# Altium PCB PCB_3U_CamLink.PCBDOC (part 2 of 2)
Units mm, origin at the board's own origin, x right, y up, seen from the top; angles counter-clockwise.
Board outline 64.5 x 100 mm, 4 copper layers (TopLayer, Internal Plane 2, Internal Plane 1, BottomLayer), stack 1.543 mm thick; 107 components, 81 nets, 488 pads, 183 vias.
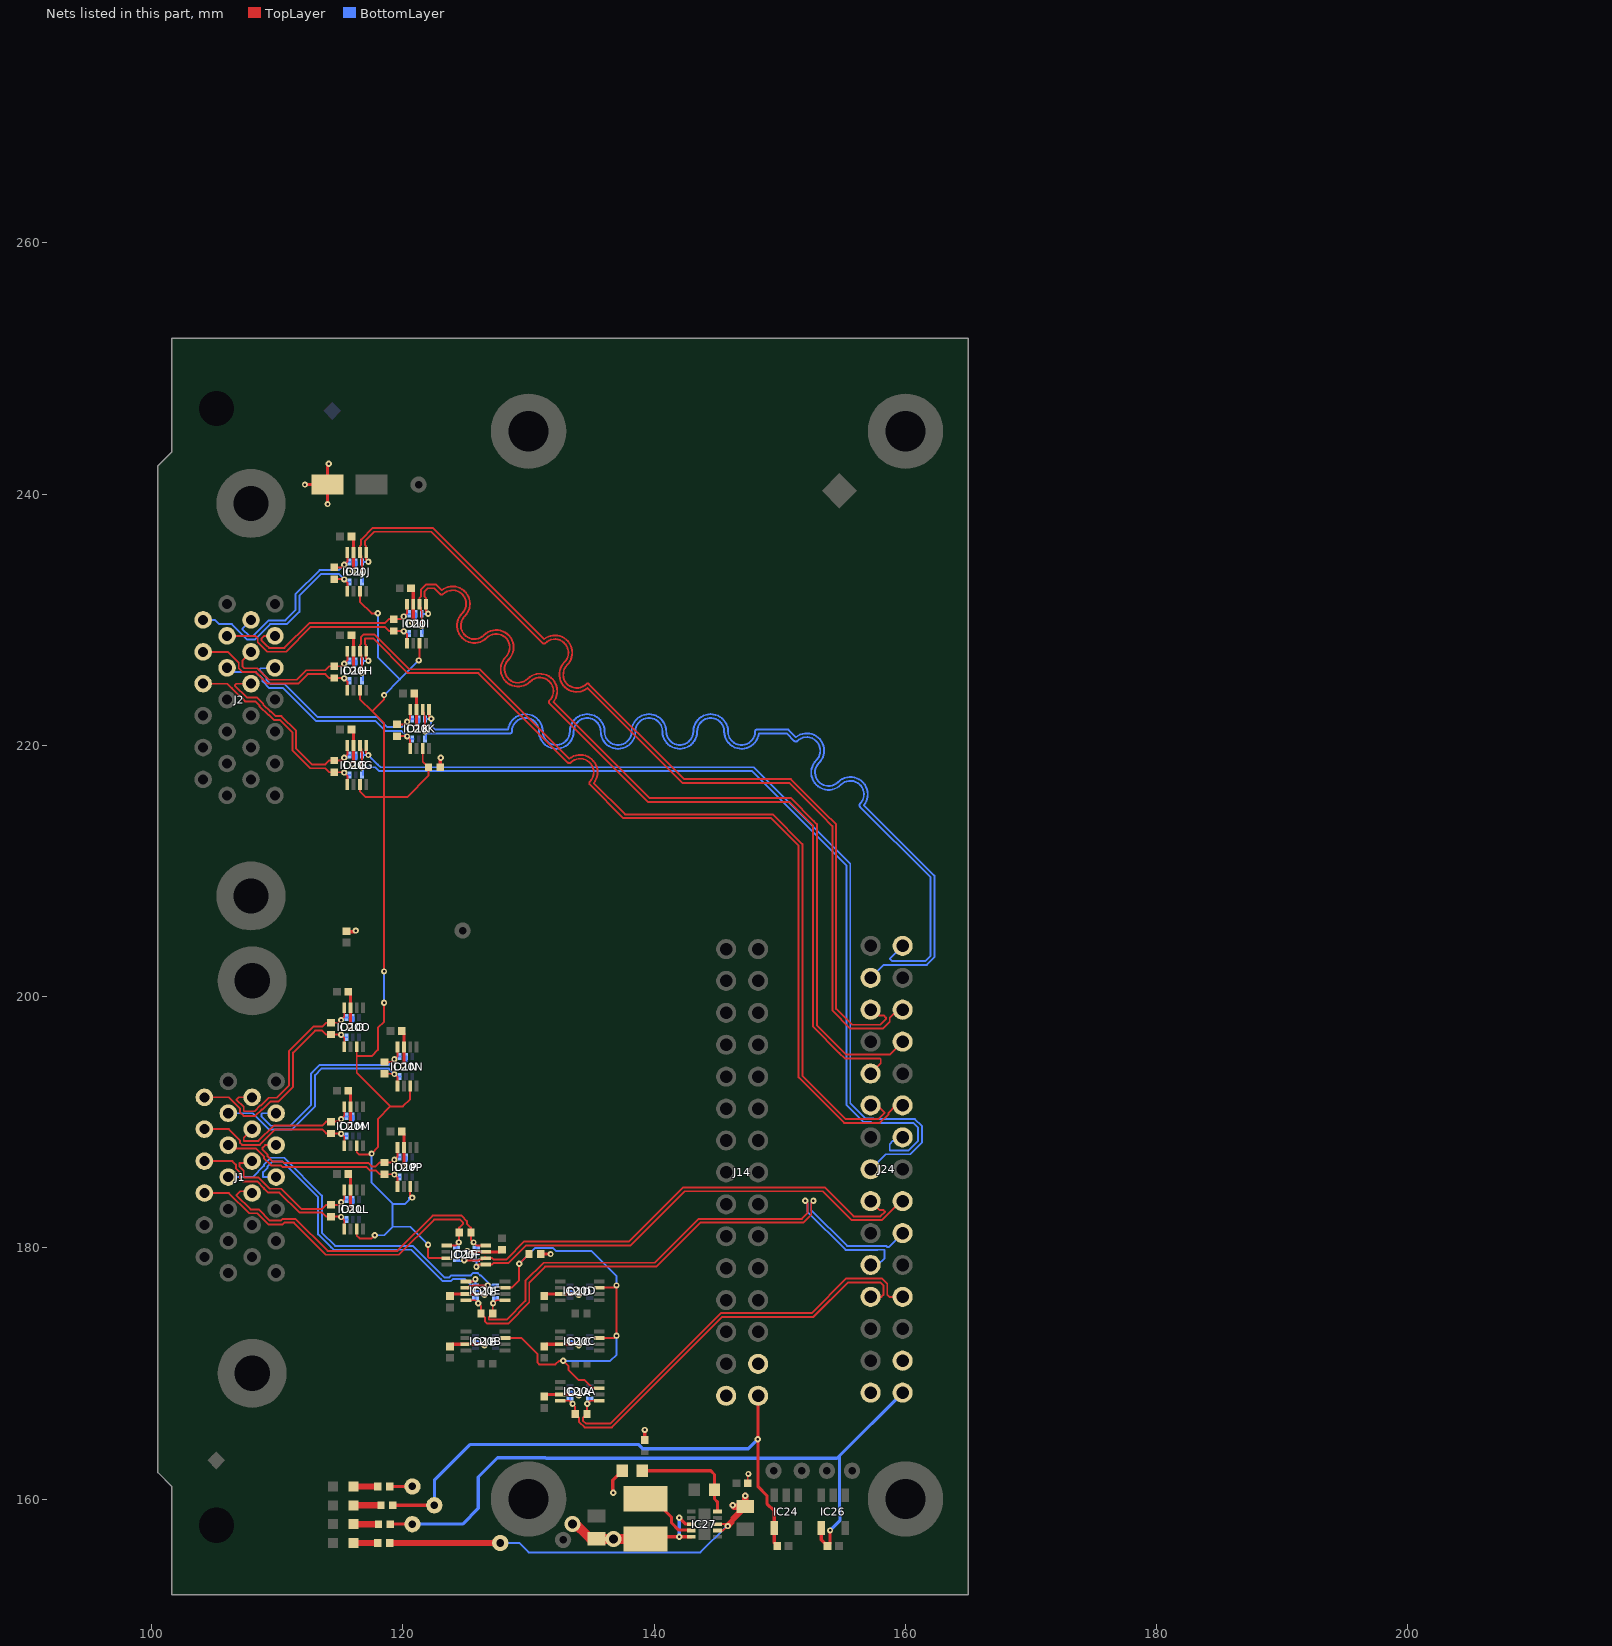
[diagram p4: the nets of this part, all layers, seen from the top]

## Via types
v1: diameter 0.5, hole 0.2, TopLayer to BottomLayer, tented both sides, 181 vias
v2: diameter 1.27, hole 0.711, TopLayer to BottomLayer, tented both sides, 2 vias

## Nets (pads, with @x,y where several pads share a name; then routed paths per layer and width w, separated by ;. In a path a pad name is that pad's centre, name@x,y a point inside that pad or via, vN(x,y) a via of type N, cw(c..) or ccw(c..) an arc to the next point about the centre after c; other vN are vias at no path point) (continued)
LVDS8_N: D1K.6 IC20K.5 J24.3 | length 74.3
  TopLayer w0.152: IC20K.5@122.075,222.85 122.075,222.275 v1(122.25,222.1)
  BottomLayer w0.152: D1K.6@121.825,222.09 122.24,222.09 v1(122.25,222.1) 122.25,221.575 122.575,221.25 128.38,221.25 cw(c129.753,221.098) 131.134,221.098 ccw(c132.21,221.098) 133.286,221.098 cw(c134.667,221.098) 136.048,221.098 ccw(c137.124,221.098) 138.2,221.098 cw(c139.581,221.098) 140.962,221.098 ccw(c142.039,221.098) 143.115,221.098 cw(c144.496,221.098) 145.877,221.098 ccw(c146.953,221.098) 148.029,221.098 cw(c148.182,221.098) 148.182,221.25 150.681,221.25 151.282,220.649 cw(c152.145,219.571) 153.526,219.571 cw(c152.145,219.571) 153.122,218.594 ccw(c153.882,217.833) 154.643,217.072 cw(c155.62,216.096) 157.001,216.096 cw(c155.62,216.096) 156.698,215.233 162.305,209.626 162.305,203.124 161.7,202.519 158.937,202.519 158.259,202.519 J24.3@157.23,201.49
LVDS8_P: D1K.1 IC20K.6 J24.2 | length 74.1
  TopLayer w0.152: IC20K.6@121.575,222.85 121.5,222.775 121.696,222.579 121.696,222.33 121.75,222.277 v1(121.75,221.125)
  BottomLayer w0.152: D1K.1@121.825,220.51 121.825,220.975 121.75,221.05 v1(121.75,221.125) 121.93,220.945 122.575,220.945 128.524,220.945 ccw(c128.524,221.098) 128.676,221.098 cw(c129.753,221.098) 130.829,221.098 ccw(c132.21,221.098) 133.591,221.098 cw(c134.667,221.098) 135.743,221.098 ccw(c137.124,221.098) 138.505,221.098 cw(c139.581,221.098) 140.658,221.098 ccw(c142.039,221.098) 143.42,221.098 cw(c144.496,221.098) 145.572,221.098 ccw(c146.953,221.098) 148.326,220.945 150.555,220.945 151.168,220.332 ; 151.168,220.332 ccw(c151.276,220.439) 151.384,220.332 cw(c152.145,219.571) 153.221,219.571 cw(c152.145,219.571) 152.906,218.81 ccw(c153.882,217.833) 154.859,216.857 cw(c155.62,216.096) 156.696,216.096 cw(c155.62,216.096) 156.381,215.335 ccw(c156.489,215.227) 156.381,215.119 162,209.5 162,203.25 161.573,202.823 158.937,202.823 158.75,203.01 J24.2@159.77,204.03
LVDS9_N: D1J.6 IC20J.5 J24.6 | length 73.8
  TopLayer w0.152: v1(117.25,234.6) 117.075,234.775 IC20J.5@117.075,235.35 117.075,235.851 116.977,235.949 116.977,236.25 117.727,237 122.25,237 131.12,228.13 ; 131.119,228.131 ccw(c131.227,228.238) 131.335,228.13 cw(c132.096,227.369) 133.172,227.369 cw(c132.096,227.369) 132.857,226.608 ccw(c133.834,225.632) 134.696,224.554 142.25,217 150.75,217 153.339,214.411 154.178,213.572 154.178,198.891 155.624,197.445 158.195,197.445 158.75,198 158.75,198.319 159.381,198.95 J24.6@159.77,198.95
  BottomLayer w0.152: D1J.6@116.825,234.59 117.24,234.59 v1(117.25,234.6)
LVDS9_P: D1J.1 IC20J.6 J24.5 | length 75.2
  TopLayer w0.152: v1(116.75,233.625) 116.75,234.777 116.696,234.83 116.696,235.079 116.5,235.275 IC20J.6@116.575,235.35 116.575,235.851 116.673,235.949 116.673,236.376 117.601,237.305 122.376,237.305 131.233,228.448 cw(c132.096,227.369) 133.477,227.369 cw(c132.096,227.369) 133.073,226.393 ccw(c133.834,225.632) 134.595,224.871 cw(c134.702,224.763) 134.811,224.871 ; 134.81,224.871 142.376,217.305 150.876,217.305 153.555,214.626 154.483,213.698 154.483,199.017 155.75,197.75 158,197.75 158.445,198.195 158.445,198.32 158.265,198.5 157.68,198.5 J24.5@157.23,198.95
  BottomLayer w0.152: v1(116.75,233.625) 116.75,233.55 116.825,233.475 D1J.1@116.825,233.01
LVDS10_N: D1I.6 IC20I.5 J24.9 | length 72.1
  TopLayer w0.152: v1(122,230.475) 121.825,230.65 IC20I.5@121.825,231.225 121.825,231.726 121.727,231.824 121.727,232.25 121.977,232.5 122.5,232.5 122.974,232.026 ; 122.974,232.026 ccw(c123.082,232.133) 123.19,232.026 cw(c123.951,231.265) 125.027,231.265 cw(c123.951,231.265) 124.712,230.504 ccw(c125.688,229.527) 126.665,228.551 cw(c127.426,227.79) 128.502,227.79 cw(c127.426,227.79) 128.187,227.029 ccw(c129.163,226.052) 130.14,225.076 cw(c130.901,224.315) 131.977,224.315 cw(c130.901,224.315) 131.662,223.554 ccw(c131.77,223.446) 131.662,223.338 ; 131.662,223.338 139.5,215.5 150.75,215.5 152.654,213.596 152.654,197.596 154.75,195.5 155.173,195.077 157.958,195.077 158.034,195 158.034,194.674 J24.9@157.23,193.87
  BottomLayer w0.152: D1I.6@121.575,230.465 121.99,230.465 v1(122,230.475)
LVDS10_P: D1I.1 IC20I.6 J24.8 | length 74.4
  TopLayer w0.152: v1(121.5,229.5) 121.5,230.652 121.446,230.705 121.446,230.954 121.25,231.15 IC20I.6@121.325,231.225 121.325,231.726 121.423,231.824 121.423,232.376 121.851,232.805 122.626,232.805 123.088,232.343 cw(c123.951,231.265) 125.332,231.265 cw(c123.951,231.265) 124.928,230.288 ccw(c125.688,229.527) 126.449,228.766 cw(c127.426,227.79) 128.807,227.79 cw(c127.426,227.79) 128.403,226.813 ccw(c129.163,226.052) 129.924,225.291 cw(c130.901,224.315) 132.282,224.315 cw(c130.901,224.315) 131.979,223.452 139.626,215.805 150.876,215.805 152.716,213.966 152.959,213.722 152.959,197.722 155.3,195.381 158.741,195.381 J24.8@159.77,196.41
  BottomLayer w0.152: v1(121.5,229.5) 121.5,229.425 121.575,229.35 D1I.1@121.575,228.885
LVDS11_N: D1H.6 IC20H.5 J24.12 | length 73.9
  TopLayer w0.152: v1(117.25,226.725) 117.075,226.9 IC20H.5@117.075,227.475 117.075,227.976 116.977,228.074 116.977,228.5 117.625,228.5 120.375,225.75 126,225.75 133.134,218.616 ; 133.134,218.616 ccw(c133.242,218.723) 133.35,218.616 cw(c134.111,217.855) 135.187,217.855 cw(c134.111,217.855) 134.872,217.094 ccw(c134.98,216.986) 134.872,216.878 ; 134.872,216.878 137.555,214.195 149.305,214.195 151.5,212 151.5,193.569 155.034,190.034 155.124,189.945 157.974,189.945 158.652,190.624 158.652,190.75 159.232,191.33 J24.12@159.77,191.33
  BottomLayer w0.152: D1H.6@116.825,226.715 117.24,226.715 v1(117.25,226.725)
LVDS11_P: D1H.1 IC20H.6 J24.11 | length 75.1
  TopLayer w0.152: v1(116.75,225.75) 116.75,226.902 116.696,226.955 116.696,227.204 116.5,227.4 IC20H.6@116.575,227.475 116.575,227.976 116.673,228.074 116.673,228.626 116.851,228.805 117.751,228.805 120.501,226.055 126.126,226.055 133.248,218.933 cw(c134.111,217.855) 135.492,217.855 cw(c134.111,217.855) 135.189,216.992 137.681,214.5 149.431,214.5 151.805,212.126 151.805,193.695 155.25,190.25 157.848,190.25 158.348,190.75 157.768,191.33 J24.11@157.23,191.33
  BottomLayer w0.152: v1(116.75,225.75) 116.75,225.675 116.825,225.6 D1H.1@116.825,225.135
LVDS12_N: D1G.6 IC20G.5 J24.15 | length 75
  TopLayer w0.152: IC20G.5@117.075,219.975 117.075,219.4 v1(117.25,219.225)
  BottomLayer w0.152: D1G.6@116.825,219.215 117.24,219.215 v1(117.25,219.225) 118.009,218.466 118.225,218.25 147.931,218.25 155.604,210.577 155.604,191.501 156.804,190.301 157.449,190.301 157.5,190.25 160.75,190.25 161.305,189.695 161.305,188.374 160.376,187.445 158.425,187.445 J24.15@157.23,186.25
LVDS12_P: D1G.1 IC20G.6 J24.14 | length 74.8
  TopLayer w0.152: IC20G.6@116.575,219.975 116.5,219.9 116.696,219.704 116.696,219.455 116.75,219.402 v1(116.75,218.25)
  BottomLayer w0.152: D1G.1@116.825,217.635 116.825,218.1 116.75,218.175 v1(116.75,218.25) 117.794,218.25 118.099,217.945 147.805,217.945 155.3,210.45 155.3,191.375 156.678,189.997 157.247,189.997 157.298,189.945 160.624,189.945 161,189.569 161,188.5 160.25,187.75 158.75,187.75 158.75,188.25 159,188.5 J24.14@159.5,188.5
LVDS13_N: D1F.6 IC20F.5 J24.18 | length 38.4
  TopLayer w0.152: v1(125.85,178.5) 126.025,178.675 IC20F.5@126.6,178.675 127.101,178.675 127.199,178.773 128.376,178.773 129.799,180.195 138.126,180.195 142.431,184.5 153.436,184.5 155.741,182.195 156.801,182.195 156.804,182.199 157.656,182.199 157.66,182.195 158.126,182.195 159.641,183.71 J24.18@159.77,183.71
  BottomLayer w0.152: D1F.6@125.84,178.925 125.84,178.51 v1(125.85,178.5)
LVDS13_P: D1F.1 IC20F.6 J24.17 | length 39.3
  TopLayer w0.152: v1(124.875,179) 126.027,179 126.08,179.054 126.329,179.054 126.525,179.25 IC20F.6@126.6,179.175 127.101,179.175 127.199,179.077 128.25,179.077 129.673,180.5 138,180.5 142.305,184.805 153.562,184.805 155.867,182.5 156.674,182.5 156.678,182.503 157.782,182.503 157.786,182.5 158,182.5 158.375,182.875 158.25,183 157.94,183 J24.17@157.23,183.71
  BottomLayer w0.152: D1F.1@124.26,178.925 124.725,178.925 124.8,179 v1(124.875,179)
LVDS14_N: D1E.3 IC20E.1 J24.21 R131E.1 | length 44.9
  TopLayer w0.152: IC20E.1@128.125,175.825 127.425,175.825 v1(127.175,175.575) 127.15,175.55 R131E.1@127.15,174.775 126.832,174.457 126.832,174.275 128.25,174.275 129.75,175.775 129.75,177.362 131.193,178.805 140.055,178.805 143.555,182.305 151.75,182.305 152.195,182.75 152.195,183.576 v1(152.021,183.75)
  BottomLayer w0.152: v1(127.175,175.575) 127.365,175.765 D1E.3@127.365,176 D1E.3@127.365,176.075 ; v1(152.021,183.75) 152.195,183.576 152.195,182.874 155.232,179.837 157.782,179.837 157.788,179.842 158.342,179.842 158.342,179.17 157.802,178.63 J24.21@157.23,178.63 157.67,179.07 J24.21@157.681,179.07
LVDS14_P: D1E.4 IC20E.8 J24.20 R131E.2 | length 44.8
  TopLayer w0.152: IC20E.8@125.025,175.825 125.75,175.825 v1(126,175.575) 126.21,175.365 R131E.2@126.21,174.775 126.528,174.457 126.528,174.149 126.706,173.97 128.376,173.97 130.055,175.649 130.055,177.236 131.319,178.5 140.181,178.5 143.681,182 151.876,182 152.5,182.624 152.5,183.576 v1(152.674,183.75)
  BottomLayer w0.152: D1E.4@125.785,176.075 D1E.4@125.785,176 125.785,175.79 v1(126,175.575) ; v1(152.674,183.75) 152.5,183.576 152.5,183 155.353,180.147 156.798,180.147 156.804,180.141 157.656,180.141 157.662,180.147 158.469,180.147 158.558,180.058 158.658,180.058 J24.20@159.77,181.17
LVDS15_N: D1A.3 IC20A.1 J24.24 R131A.1 | length 34.5
  TopLayer w0.152: IC20A.1@135.625,167.825 134.925,167.825 v1(134.675,167.575) 134.65,167.55 R131A.1@134.65,166.775 134.332,166.457 134.332,166.25 134.582,166 136.5,166 145.305,174.805 152.555,174.805 155.305,177.555 158.126,177.555 158.466,177.216 158.555,177.126 158.555,176.25 158.715,176.09 J24.24@159.77,176.09
  BottomLayer w0.152: v1(134.675,167.575) 134.865,167.765 D1A.3@134.865,168 D1A.3@134.865,168.075
LVDS15_P: D1A.4 IC20A.8 J24.23 R131A.2 | length 34.5
  TopLayer w0.152: IC20A.8@132.525,167.825 133.25,167.825 v1(133.5,167.575) 133.71,167.365 R131A.2@133.71,166.775 134.028,166.457 134.028,166.124 134.456,165.695 136.626,165.695 145.431,174.5 152.681,174.5 155.431,177.25 158,177.25 158.25,177 158.25,176.25 158.09,176.09 J24.23@157.23,176.09
  BottomLayer w0.152: D1A.4@133.285,168.075 D1A.4@133.285,168 133.285,167.79 v1(133.5,167.575)
NetIC27_5: IC27.5 R121.1 R122.2 | length 8.9
  TopLayer w0.254: R121.1@139.05,162.25 144.5,162.25 144.8,161.95 R122.2@144.8,160.75 144.8,160 145.05,159.75 IC27.5@145.05,159
NetIC27_9: IC27.9 L2.1 | length 4.9
  TopLayer w0.254: L2.1@139.319,160.02 139.915,160.02 141.369,158.566 141.369,158.131 141.971,157.529 142.921,157.529 IC27.9@142.95,157.5
NetLD5_2: LD5.2 R1.1 | length 1.9
  TopLayer w0.508: LD5.2@116.075,156.5 R1.1@118,156.5
NetLD6_2: LD6.2 R2.2 | length 1.9
  TopLayer w0.508: LD6.2@116.075,161 R2.2@118,161
NetLD7_2: LD7.2 R3.2 | length 2
  TopLayer w0.508: LD7.2@116.075,158 R3.2@118.06,158
NetLD8_2: LD8.2 R4.2 | length 2.2
  TopLayer w0.508: LD8.2@116.075,159.5 R4.2@118.25,159.5
P3V3: B10.1 C47A.2 C47B.2 C47C.2 C47D.2 C47E.2 C47F.2 C47G.2 C47H.2 C47I.2 C47J.2 C47K.2 C47L.2 C47M.2 C47N.2 C47O.2 C47P.2 C59.2 C62.1 C65.2 C66.2 D1A.5 D1B.5 D1C.5 D1D.5 D1E.5 D1F.5 D1G.5 D1H.5 D1I.5 D1J.5 D1K.5 D1L.5 D1M.5 D1N.5 D1O.5 D1P.5 IC20A.7 IC20B.7 IC20C.7 IC20D.7 IC20E.7 IC20F.7 IC20G.7 IC20H.7 IC20I.7 IC20J.7 IC20K.7 IC20L.7 IC20M.7 IC20N.7 IC20O.7 IC20P.7 IC27.8 IC27.10 L2.2 R2.1 R8.1 R9.1 R121.2 | length 84.3
  TopLayer w0.254: v1(112.2,240.75) C62.1@114,240.75 ; v1(114,239.2) C62.1@114,240.75 ; v1(114.1,242.4) 114,242.3 C62.1@114,240.75 ; C59.2@115.5,205.15 116.15,205.15 v1(116.25,205.25) ; C47L.2@115.65,185.875 115.825,185.7 115.825,183.351 115.75,183.276 v1@115.75,183.125 ; C47M.2@115.65,192.5 115.825,192.325 115.825,189.976 115.75,189.901 v1(115.75,189.75) ; C47O.2@115.65,200.375 115.825,200.2 IC20O.7@115.825,199.1 115.825,197.851 115.75,197.776 v1(115.75,197.625) ; C47G.2@115.9,221.25 116.075,221.075 116.075,218.726 116,218.651 v1(116,218.5) ; C47H.2@115.9,228.75 116.075,228.575 116.075,226.226 116,226.151 v1(116,226) ; C47J.2@115.9,236.625 116.075,236.45 116.075,234.101 116,234.026 v1(116,233.875) ; R2.1@118.94,161 B10.1@120.75,161 ; C47P.2@119.9,189.25 120.075,189.075 IC20P.7@120.075,187.975 120.075,186.726 120,186.651 v1(120,186.5) ; C47N.2@119.9,197.25 120.075,197.075 120.075,194.726 120,194.651 v1(120,194.5) ; C47I.2@120.65,232.5 120.825,232.325 120.825,229.976 120.75,229.901 v1(120.75,229.75) ; C47K.2@120.9,224.125 121.075,223.95 IC20K.7@121.075,222.85 121.075,221.601 121,221.526 v1(121,221.375) ; R8.1@122.97,218.25 122.97,218.97 v1(123,219) ; C47B.2@123.75,172.15 123.925,172.325 IC20B.7@125.025,172.325 126.274,172.325 126.349,172.25 v1(126.5,172.25) ; C47E.2@123.75,176.15 123.925,176.325 IC20E.7@125.025,176.325 126.274,176.325 126.349,176.25 v1(126.5,176.25) ; v1(125.125,179.75) 125.276,179.75 125.351,179.675 127.7,179.675 C47F.2@127.875,179.85 ; R9.1@130.97,179.5 v1(131.75,179.5) ; C47A.2@131.25,168.15 131.425,168.325 133.774,168.325 133.849,168.25 v1(134,168.25) ; C47C.2@131.25,172.15 131.425,172.325 133.774,172.325 133.849,172.25 v1(134,172.25) ; C47D.2@131.25,176.15 131.425,176.325 IC20D.7@132.525,176.325 133.774,176.325 133.849,176.25 v1(134,176.25) ; v1(136.75,160.5) 136.7,160.55 136.7,161.5 R121.2@137.45,162.25 ; C65.2@139.25,164.7 v1(139.25,165.5) ; L2.2@139.319,156.82 139.499,157 IC27.10@142.95,157 ; v1(142,158.5) 142.5,158 IC27.8@142.95,158
  TopLayer w0.762: v2@133.5,158.25 134.907,156.843 C66.2@135.407,156.843 135.43,156.82 v2(136.75,156.82) L2.2@139.319,156.82
  BottomLayer w0.254: v1(115.75,183.125) 115.75,183.24 115.721,183.269 115.727,183.276 115.766,183.276 116,183.51 D1L.5@116,183.84 ; v1(115.75,189.75) 115.75,189.865 115.721,189.894 115.727,189.901 115.766,189.901 116,190.135 D1M.5@116,190.465 ; v1(115.75,197.625) 115.75,197.74 115.721,197.769 115.727,197.776 115.766,197.776 116,198.01 D1O.5@116,198.34 ; v1(116,218.5) 116,218.615 115.971,218.644 115.977,218.651 116.016,218.651 116.25,218.885 D1G.5@116.25,219.215 ; v1(116,226) 116,226.115 115.971,226.144 115.977,226.151 116.016,226.151 116.25,226.385 D1H.5@116.25,226.715 ; v1(116,233.875) 116,233.99 115.971,234.019 115.977,234.026 116.016,234.026 116.25,234.26 D1J.5@116.25,234.59 ; v1(120,186.5) 120,186.615 119.971,186.644 119.977,186.651 120.016,186.651 120.25,186.885 D1P.5@120.25,187.215 ; v1(120,194.5) 120,194.615 119.971,194.644 119.977,194.651 120.016,194.651 120.25,194.885 D1N.5@120.25,195.215 ; v1(120.75,229.75) 120.75,229.865 120.721,229.894 120.727,229.901 120.766,229.901 121,230.135 D1I.5@121,230.465 ; v1(121,221.375) 121,221.49 120.971,221.519 120.977,221.526 121.016,221.526 121.25,221.76 D1K.5@121.25,222.09 ; v1(125.125,179.75) 125.24,179.75 125.269,179.779 125.276,179.773 125.276,179.734 125.51,179.5 D1F.5@125.84,179.5 ; D1B.5@125.785,172.5 126.115,172.5 126.349,172.266 126.349,172.227 126.356,172.221 126.385,172.25 v1(126.5,172.25) ; D1E.5@125.785,176.5 126.115,176.5 126.349,176.266 126.349,176.227 126.356,176.221 126.385,176.25 v1(126.5,176.25) ; D1A.5@133.285,168.5 133.615,168.5 133.849,168.266 133.849,168.227 133.856,168.221 133.885,168.25 v1(134,168.25) ; D1C.5@133.285,172.5 133.615,172.5 133.849,172.266 133.849,172.227 133.856,172.221 133.885,172.25 v1(134,172.25) ; D1D.5@133.285,176.5 133.615,176.5 133.849,176.266 133.849,176.227 133.856,176.221 133.885,176.25 v1(134,176.25) ; v1(142,157) v1(142,158.5)
  other v2: 133.5,158
P3V3_MP1: B8.1 C58.2 IC24.4 J14.30 R4.1 | length 45.3
  TopLayer w0.254: R4.1@119.19,159.5 B8.1@122.5,159.5 ; J14.30@148.27,168.22 148.27,160.98 148.971,160.279 148.971,159.634 149.55,159.055 IC24.4@149.55,157.7 149.55,156.5 C58.2@149.8,156.25
  BottomLayer w0.254: B8.1@122.5,159.5 122.5,161.5 125.329,164.329 138.769,164.329 139.099,164 147.5,164 v1(148.25,164.75)
P3V3_MP2: B6.1 C64.2 IC26.4 J24.30 R3.1 | length 55.9
  TopLayer w0.254: R3.1@119,158 B6.1@120.75,158 ; IC26.4@153.3,157.7 153.3,156.75 C64.2@153.8,156.25 154,156.45 v1(154,157.5)
  BottomLayer w0.254: B6.1@120.75,158 124.75,158 126,159.25 126,161.75 127.529,163.279 131.358,163.279 131.388,163.25 154.55,163.25 154.75,163.45 ; v1(154,157.5) 154.779,158.279 154.779,159.219 154.75,159.249 154.75,163.45 ; J24.30@159.77,168.47 154.75,163.45
P12V0: B11.1 C67.2 C68.2 IC27.2 IC27.3 J14.28 J14.29 J24.28 J24.29 R1.2 | length 34.9
  TopLayer w0.152: IC27.2@145.05,157.5 145.5,157.5 v1(145.85,157.85) ; IC27.3@145.05,158 145.85,158 146.325,158.475 ; C67.2@147.45,161.25 147.45,161.95 v1(147.5,162)
  TopLayer w0.508: R1.2@118.94,156.5 B11.1@127.75,156.5 ; v1(145.85,157.85) 146.144,158.144 ; v1(146.25,159.5) 146.35,159.4 C68.2@147.25,159.4 ; 146.325,158.475 C68.2@147.25,159.4 ; v1(147.25,160.25) C68.2@147.25,159.4
  BottomLayer w0.152: B11.1@127.75,156.5 129.25,156.5 129.997,155.753 143.676,155.753 145.773,157.85 v1(145.85,157.85)
RX_EN: IC20F.3 IC20G.3 IC20H.3 IC20I.3 IC20J.3 IC20K.3 IC20L.3 IC20M.3 IC20N.3 IC20O.3 IC20P.3 R8.2 | length 90.4
  TopLayer w0.152: IC20L.3@116.325,181.5 116.325,180.975 116.55,180.75 117.5,180.75 v1(117.75,181) ; IC20M.3@116.325,188.125 116.325,187.6 116.5,187.425 117.425,187.425 v1(117.5,187.5) 118,188 118,190.25 119,191.25 ; IC20O.3@116.325,196 116.325,195.25 ; IC20G.3@116.575,216.875 116.575,216.35 117.05,215.875 118.5,215.875 ; IC20H.3@116.575,224.375 116.575,223.675 117.537,222.713 ; IC20J.3@116.575,232.25 116.575,231.425 117.5,230.5 v1(118,230.5) ; v1(118.5,199.5) 118.5,198 118,197.5 118,195.75 117.5,195.25 116.325,195.25 ; v1(118.5,202) 118.5,215.875 ; v1(118.5,224) 118.5,223.675 117.537,222.713 ; IC20P.3@120.575,184.875 120.575,184.174 v1(120.75,184) ; IC20N.3@120.575,192.875 120.575,191.825 120,191.25 119,191.25 ; v1(121.25,226.75) 121.325,226.825 IC20I.3@121.325,228.125 ; IC20K.3@121.575,219.75 121.575,218.705 R8.2@122.03,218.25 122.03,217.579 120.326,215.875 118.5,215.875 ; v1(122,180.25) 122,179.25 122.075,179.175 IC20F.3@123.5,179.175 ; 116.325,195.25 116.325,193.925 119,191.25 ; 117.537,222.713 118.5,221.75 118.5,215.875
  BottomLayer w0.152: v1(117.5,187.5) 117.5,185.175 119.175,183.5 ; v1(117.75,181) 118.5,181 119.175,181.675 ; v1(118,230.5) 118,227 119.75,225.25 ; v1(118.5,199.5) v1(118.5,202) ; v1(118.5,224) 119.75,225.25 ; v1(120.75,184) 120.5,184 120.478,183.978 120.478,183.802 120.176,183.5 119.175,183.5 ; v1(121.25,226.75) 119.75,225.25 ; v1(122,180.25) 120.575,181.675 119.175,181.675 ; 119.175,181.675 119.175,183.5
SERRX_N: D1F.3 IC20F.1 J1.19 R131F.1 | length 27.4
  TopLayer w0.152: J1.19@104.19,184.359 106.141,184.359 107.752,182.748 108.385,182.748 109.277,181.856 110.416,181.856 110.56,182 111.319,182 113.874,179.445 119.678,179.445 122.483,182.25 124.543,182.25 124.793,182 124.793,181.929 124.475,181.611 R131F.1@124.475,181.225 124.475,180.45 v1(124.45,180.425) 124.2,180.175 IC20F.1@123.5,180.175
  BottomLayer w0.152: D1F.3@124.26,179.925 D1F.3@124.26,180 124.26,180.235 v1(124.45,180.425)
SERRX_P: D1F.4 IC20F.8 J1.6 R131F.2 | length 26.7
  TopLayer w0.152: J1.6@108,184.359 107.859,184.5 107.069,184.5 106.75,184.181 107.879,183.052 108.511,183.052 109.403,182.16 110.29,182.16 110.434,182.305 111.445,182.305 114,179.75 119.552,179.75 122.357,182.555 124.669,182.555 125.097,182.126 125.097,181.929 125.415,181.611 R131F.2@125.415,181.225 125.415,180.635 v1(125.625,180.425) 125.875,180.175 IC20F.8@126.6,180.175
  BottomLayer w0.152: v1(125.625,180.425) 125.84,180.21 D1F.4@125.84,180 D1F.4@125.84,179.925
SERTX_N: D1E.6 IC20E.5 J1.7 | length 25.9
  TopLayer w0.152: IC20E.5@125.025,177.325 125.6,177.325 v1(125.775,177.5)
  BottomLayer w0.152: J1.7@109.905,185.629 108.871,185.629 108.871,186.026 109.233,186.388 109.233,186.483 109.612,186.862 110.416,186.862 113.25,184.028 113.25,181.069 114.284,180.034 114.477,179.842 120.658,179.842 123,177.5 123.017,177.5 123.176,177.342 123.824,177.342 123.983,177.5 124.924,177.5 125.424,177 D1E.6@125.785,177 ; v1(125.775,177.5) 125.785,177.49 D1E.6@125.785,177.075
SERTX_P: D1E.1 IC20E.6 J1.20 | length 30
  TopLayer w0.152: IC20E.6@125.025,176.825 125.1,176.75 125.296,176.946 125.545,176.946 125.598,177 v1(126.75,177)
  BottomLayer w0.152: J1.20@106.095,185.629 108.043,185.629 108.929,186.514 108.929,186.61 109.486,187.167 110.542,187.167 113.555,184.155 113.555,181.195 114.603,180.147 120.784,180.147 123.126,177.805 123.143,177.805 123.302,177.646 123.698,177.646 123.857,177.805 125.403,177.805 125.577,177.979 125.973,177.979 126.147,177.805 126.199,177.805 127.004,177 D1E.1@127.365,177
TX_EN: IC20A.3 IC20B.3 IC20C.3 IC20D.3 IC20E.3 R9.2 | length 36.5
  TopLayer w0.152: IC20B.3@128.125,172.825 129.425,172.825 130.711,171.539 130.711,170.845 130.845,170.711 132.138,170.711 132.427,171 v1(132.75,171) 133.191,170.559 133.191,170.26 133.974,169.478 134.448,169.478 135.101,168.825 IC20A.3@135.625,168.825 ; IC20E.3@128.125,176.825 128.65,176.825 129.25,177.425 v1(129.25,178.72) R9.2@130.03,179.5 ; IC20C.3@135.625,172.825 136.825,172.825 v1(137,173) v1(137,177) 136.825,176.825 IC20D.3@135.625,176.825
  BottomLayer w0.152: v1(129.25,178.72) 130.509,179.979 131.948,179.979 132.177,179.75 135,179.75 137,177.75 v1(137,177) ; v1(132.75,171) 136.5,171 137,171.5 v1(137,173)
X0_N: D1O.3 IC20O.1 J1.25 R131O.1 | length 17.9
  TopLayer w0.152: J1.25@104.19,191.979 106.138,191.979 107.024,191.094 107.024,190.795 107.319,190.5 108.25,190.5 108.75,191 108.805,191 109.442,191.638 110.069,191.638 111.25,192.819 111.25,195.543 113,197.293 113.571,197.293 113.889,196.975 R131O.1@114.275,196.975 115.05,196.975 v1(115.075,196.95) 115.325,196.7 IC20O.1@115.325,196
  BottomLayer w0.152: v1(115.075,196.95) 115.265,196.76 D1O.3@115.5,196.76 D1O.3@115.575,196.76
X0_P: D1O.4 IC20O.8 J1.12 R131O.2 | length 16.9
  TopLayer w0.152: J1.12@107.67,191.649 J1.12@108,191.979 106.931,191.979 106.75,191.798 107.328,191.22 107.328,190.922 107.382,190.868 108.187,190.868 108.659,191.341 108.714,191.341 109.316,191.942 109.942,191.942 110.945,192.945 110.945,195.669 112.874,197.597 113.571,197.597 113.889,197.915 R131O.2@114.275,197.915 114.865,197.915 v1(115.075,198.125) 115.325,198.375 IC20O.8@115.325,199.1
  BottomLayer w0.152: v1(115.075,198.125) 115.29,198.34 D1O.4@115.5,198.34 D1O.4@115.575,198.34
X1_N: D1N.3 IC20N.1 J1.24 R131N.1 | length 19.9
  TopLayer w0.152: R131N.1@118.525,193.85 119.3,193.85 v1(119.325,193.825) 119.575,193.575 IC20N.1@119.575,192.875
  BottomLayer w0.152: J1.24@106.095,190.709 108.043,190.709 109.342,189.411 111.161,189.411 111.25,189.5 113,191.25 113,193.75 113.51,194.26 118.89,194.26 v1(119.325,193.825) 119.515,193.635 D1N.3@119.75,193.635 D1N.3@119.825,193.635
X1_P: D1N.4 IC20N.8 J1.11 R131N.2 | length 18.5
  TopLayer w0.152: R131N.2@118.525,194.79 119.115,194.79 v1(119.325,195) 119.575,195.25 IC20N.8@119.575,195.975
  BottomLayer w0.152: J1.11@109.905,190.709 108.791,190.709 108.75,190.668 108.75,190.433 109.468,189.716 111.034,189.716 112.695,191.376 112.695,193.876 112.784,193.966 113.384,194.565 118.89,194.565 v1(119.325,195) 119.54,195.215 D1N.4@119.75,195.215 D1N.4@119.825,195.215
X2_N: D1M.3 IC20M.1 J1.23 R131M.1 | length 13.8
  TopLayer w0.152: J1.23@104.19,189.439 106.138,189.439 107.024,188.554 107.024,188.374 107.202,188.195 108.618,188.195 109.84,189.418 113.571,189.418 113.889,189.1 R131M.1@114.275,189.1 115.05,189.1 v1(115.075,189.075) 115.325,188.825 IC20M.1@115.325,188.125
  BottomLayer w0.152: v1(115.075,189.075) 115.265,188.885 D1M.3@115.5,188.885 D1M.3@115.575,188.885
X2_P: D1M.4 IC20M.8 J1.10 R131M.2 | length 11.1
  TopLayer w0.152: J1.10@107.845,189.284 107.328,188.767 107.328,188.5 108.492,188.5 109.714,189.722 113.571,189.722 113.889,190.04 R131M.2@114.275,190.04 114.865,190.04 v1(115.075,190.25) 115.325,190.5 IC20M.8@115.325,191.225
  BottomLayer w0.152: v1(115.075,190.25) 115.29,190.465 D1M.4@115.5,190.465 D1M.4@115.575,190.465
X3_N: D1L.3 IC20L.1 J1.21 R131L.1 | length 14.8
  TopLayer w0.152: J1.21@104.19,186.899 106.42,186.899 106.695,186.624 106.695,186.342 107.024,186.014 107.024,185.545 107.281,185.288 108.385,185.288 108.929,184.744 108.929,184.679 108.994,184.679 109.277,184.396 110.173,184.396 111.776,182.793 113.571,182.793 113.889,182.475 R131L.1@114.275,182.475 115.05,182.475 v1(115.075,182.45) 115.325,182.2 IC20L.1@115.325,181.5
  BottomLayer w0.152: v1(115.075,182.45) 115.265,182.26 D1L.3@115.5,182.26 D1L.3@115.575,182.26
X3_P: D1L.4 IC20L.8 J1.8 R131L.2 | length 13
  TopLayer w0.152: J1.8@108,186.899 107.851,186.75 107,186.75 107,186.468 107.328,186.14 107.328,185.672 107.408,185.592 108.511,185.592 109.403,184.7 110.3,184.7 111.903,183.097 113.571,183.097 113.889,183.415 R131L.2@114.275,183.415 114.865,183.415 v1(115.075,183.625) 115.325,183.875 IC20L.8@115.325,184.6
  BottomLayer w0.152: v1(115.075,183.625) 115.29,183.84 D1L.4@115.5,183.84 D1L.4@115.575,183.84
XCLK_N: D1P.3 IC20P.1 J1.22 R131P.1 | length 15.6
  TopLayer w0.152: J1.22@106.426,188.169 106.705,187.89 108.322,187.89 108.929,187.284 108.929,187.14 109.511,186.558 110.29,186.558 110.402,186.445 117.096,186.445 117.374,186.168 117.821,186.168 118.139,185.85 R131P.1@118.525,185.85 119.3,185.85 v1(119.325,185.825) 119.575,185.575 IC20P.1@119.575,184.875
  BottomLayer w0.152: v1(119.325,185.825) 119.515,185.635 D1P.3@119.75,185.635 D1P.3@119.825,185.635
XCLK_P: D1P.4 IC20P.8 J1.9 R131P.2 | length 14.2
  TopLayer w0.152: J1.9@109.728,188.169 109.023,188.169 108.822,187.968 108.822,187.822 109.233,187.41 109.233,187.267 109.638,186.862 110.416,186.862 110.528,186.75 117.222,186.75 117.5,186.472 117.821,186.472 118.139,186.79 R131P.2@118.525,186.79 119.115,186.79 v1(119.325,187) 119.575,187.25 IC20P.8@119.575,187.975
  BottomLayer w0.152: v1(119.325,187) 119.54,187.215 D1P.4@119.75,187.215 D1P.4@119.825,187.215
Y0_N: D1J.3 IC20J.1 J2.25 R131J.1 | length 17.4
  TopLayer w0.152: R131J.1@114.525,233.225 115.3,233.225 v1(115.325,233.2) 115.575,232.95 IC20J.1@115.575,232.25
  BottomLayer w0.152: J2.25@104.095,229.98 105.02,229.98 105.361,229.639 106.385,229.639 107.618,228.405 108.192,228.405 109.425,229.639 110.765,229.639 111.75,230.624 111.75,231.885 113.5,233.635 114.89,233.635 v1(115.325,233.2) 115.515,233.01 D1J.3@115.75,233.01 D1J.3@115.825,233.01
Y0_P: D1J.4 IC20J.8 J2.12 R131J.2 | length 14.7
  TopLayer w0.152: R131J.2@114.525,234.165 115.115,234.165 v1(115.325,234.375) 115.575,234.625 IC20J.8@115.575,235.35
  BottomLayer w0.152: J2.12@107.685,229.76 107.21,229.285 107.21,229.25 107.75,228.71 108.066,228.71 109.299,229.943 110.639,229.943 111.445,230.75 111.445,232.011 113.374,233.94 114.89,233.94 v1(115.325,234.375) 115.54,234.59 D1J.4@115.75,234.59 D1J.4@115.825,234.59
Y1_N: D1I.3 IC20I.1 J2.24 R131I.1 | length 17.4
  TopLayer w0.152: J2.24@106,228.71 108.235,228.71 108.445,228.5 108.445,228.213 109.213,227.445 110.695,227.445 112.668,229.418 118.571,229.418 118.889,229.1 R131I.1@119.275,229.1 120.05,229.1 v1(120.075,229.075) 120.325,228.825 IC20I.1@120.325,228.125
  BottomLayer w0.152: v1(120.075,229.075) 120.265,228.885 D1I.3@120.5,228.885 D1I.3@120.575,228.885
Y1_P: D1I.4 IC20I.8 J2.11 R131I.2 | length 15.6
  TopLayer w0.152: J2.11@109.81,228.71 108.96,228.71 108.75,228.5 108.75,228.339 109.138,227.951 109.339,227.75 110.569,227.75 112.541,229.722 118.571,229.722 118.889,230.04 R131I.2@119.275,230.04 119.865,230.04 v1(120.075,230.25) 120.325,230.5 IC20I.8@120.325,231.225
  BottomLayer w0.152: v1(120.075,230.25) 120.29,230.465 D1I.4@120.5,230.465 D1I.4@120.575,230.465
Y2_N: D1H.3 IC20H.1 J2.23 R131H.1 | length 14.6
  TopLayer w0.152: J2.23@104.095,227.44 106.043,227.44 106.929,226.555 106.929,226.14 107.24,225.829 108.29,225.829 109.208,224.911 111.661,224.911 112.418,225.668 113.821,225.668 114.139,225.35 R131H.1@114.525,225.35 115.3,225.35 v1(115.325,225.325) 115.575,225.075 IC20H.1@115.575,224.375
  BottomLayer w0.152: v1(115.325,225.325) 115.515,225.135 D1H.3@115.75,225.135 D1H.3@115.825,225.135
Y2_P: D1H.4 IC20H.8 J2.10 R131H.2 | length 12.2
  TopLayer w0.152: J2.10@107.905,227.44 107.233,226.768 107.233,226.267 107.367,226.133 108.416,226.133 109.138,225.411 109.334,225.216 111.534,225.216 112.291,225.972 113.821,225.972 114.139,226.29 R131H.2@114.525,226.29 115.115,226.29 v1(115.325,226.5) 115.575,226.75 IC20H.8@115.575,227.475
  BottomLayer w0.152: v1(115.325,226.5) 115.54,226.715 D1H.4@115.75,226.715 D1H.4@115.825,226.715
Y3_N: D1G.3 IC20G.1 J2.21 R131G.1 | length 16.7
  TopLayer w0.152: J2.21@104.095,224.9 106.032,224.9 106.374,224.559 106.385,224.559 107.443,223.5 108.25,223.5 108.577,223.173 108.577,223.119 109.299,222.397 109.353,222.397 109.731,222.019 110.195,222.019 111.195,221.018 111.195,219.596 112.624,218.168 113.821,218.168 114.139,217.85 R131G.1@114.525,217.85 115.3,217.85 v1(115.325,217.825) 115.575,217.575 IC20G.1@115.575,216.875
  BottomLayer w0.152: v1(115.325,217.825) 115.515,217.635 D1G.3@115.75,217.635 D1G.3@115.825,217.635
Y3_P: D1G.4 IC20G.8 J2.8 R131G.2 | length 15.4
  TopLayer w0.152: J2.8@107.905,224.9 106.75,224.9 106.624,224.774 106.624,224.75 107.569,223.805 108.376,223.805 108.881,223.3 108.881,223.245 109.425,222.701 109.48,222.701 109.858,222.323 110.321,222.323 111.5,221.144 111.5,219.722 112.75,218.472 113.821,218.472 114.139,218.79 R131G.2@114.525,218.79 115.115,218.79 v1(115.325,219) 115.575,219.25 IC20G.8@115.575,219.975
  BottomLayer w0.152: v1(115.325,219) 115.54,219.215 D1G.4@115.75,219.215 D1G.4@115.825,219.215
YCLK_N: D1K.3 IC20K.1 J2.22 R131K.1 | length 19.1
  TopLayer w0.152: R131K.1@119.525,220.725 120.3,220.725 v1(120.325,220.7) 120.575,220.45 IC20K.1@120.575,219.75
  BottomLayer w0.152: J2.22@106,226.17 106.341,225.829 108.29,225.829 108.834,225.285 108.834,225.089 109.364,224.559 110.459,224.559 113.073,221.945 117.814,221.945 118.624,221.135 119.89,221.135 v1(120.325,220.7) 120.515,220.51 D1K.3@120.75,220.51 D1K.3@120.825,220.51
YCLK_P: D1K.4 IC20K.8 J2.9 R131K.2 | length 17.8
  TopLayer w0.152: R131K.2@119.525,221.665 120.115,221.665 v1(120.325,221.875) 120.575,222.125 IC20K.8@120.575,222.85
  BottomLayer w0.152: J2.9@109.81,226.17 109.773,226.133 108.683,226.133 108.549,226 109.138,225.411 109.138,225.216 109.491,224.863 110.586,224.863 110.699,224.75 113.199,222.25 117.94,222.25 118.75,221.44 119.89,221.44 v1(120.325,221.875) 120.54,222.09 D1K.4@120.75,222.09 D1K.4@120.825,222.09
pads on no net: FTG21.FTG2 FTG22.1 FTG23.1 FTG24.1 IC24.5 IC26.5 IC27.4 IC27.7 J2.2 J2.3 J2.4 J2.5 J2.6 J2.7 J2.15 J2.16 J2.17 J2.18 J2.19 J2.20
copper on no net: | length 2675.9
  TopLayer w0.025: 179.832,247.634 180.84,246.626 ; 179.832,249.158 182.364,246.626 ; 179.832,250.682 182.88,247.634 183.888,246.626 ; 179.832,252.206 182.88,249.158 185.412,246.626 ; 179.832,253.73 182.88,250.682 185.928,247.634 186.936,246.626 ; 179.832,255.254 182.88,252.206 185.928,249.158 188.46,246.626 ; 179.832,256.778 182.88,253.73 185.928,250.682 188.976,247.634 189.984,246.626 ; 179.832,258.302 182.88,255.254 185.928,252.206 188.976,249.158 191.508,246.626 ; 179.832,259.826 182.88,256.778 185.928,253.73 188.976,250.682 192.024,247.634 193.032,246.626 ; 179.832,261.35 182.88,258.302 185.928,255.254 188.976,252.206 192.024,249.158 194.556,246.626 ; 179.832,262.874 182.88,259.826 185.928,256.778 188.976,253.73 192.024,250.682 195.072,247.634 196.08,246.626 ; 179.832,264.398 182.88,261.35 185.928,258.302 188.976,255.254 192.024,252.206 195.072,249.158 197.604,246.626 ; 179.832,265.922 182.88,262.874 185.928,259.826 188.976,256.778 192.024,253.73 195.072,250.682 198.12,247.634 199.128,246.626 ; 179.832,267.446 182.88,264.398 185.928,261.35 188.976,258.302 192.024,255.254 195.072,252.206 198.12,249.158 200.652,246.626 ; 179.832,268.97 182.88,265.922 185.928,262.874 188.976,259.826 192.024,256.778 195.072,253.73 198.12,250.682 201.168,247.634 202.176,246.626 ; 179.832,270.494 182.88,267.446 185.928,264.398 188.976,261.35 192.024,258.302 195.072,255.254 198.12,252.206 201.168,249.158 203.7,246.626 ; 179.832,272.018 182.88,268.97 185.928,265.922 188.976,262.874 192.024,259.826 195.072,256.778 198.12,253.73 201.168,250.682 204.216,247.634 205.224,246.626 ; 179.832,273.542 182.88,270.494 185.928,267.446 188.976,264.398 192.024,261.35 195.072,258.302 198.12,255.254 201.168,252.206 204.216,249.158 206.748,246.626 ; 179.832,275.066 182.88,272.018 185.928,268.97 188.976,265.922 192.024,262.874 195.072,259.826 198.12,256.778 201.168,253.73 204.216,250.682 207.264,247.634 208.272,246.626 ; 181.356,275.066 182.88,273.542 185.928,270.494 188.976,267.446 192.024,264.398 195.072,261.35 198.12,258.302 201.168,255.254 204.216,252.206 207.264,249.158 209.796,246.626 ; 182.88,275.066 185.928,272.018 188.976,268.97 192.024,265.922 195.072,262.874 198.12,259.826 201.168,256.778 204.216,253.73 207.264,250.682 210.312,247.634 211.32,246.626 ; 184.404,275.066 185.928,273.542 188.976,270.494 192.024,267.446 195.072,264.398 198.12,261.35 201.168,258.302 204.216,255.254 207.264,252.206 210.312,249.158 212.844,246.626 ; 185.928,275.066 188.976,272.018 192.024,268.97 195.072,265.922 198.12,262.874 201.168,259.826 204.216,256.778 207.264,253.73 210.312,250.682 213.36,247.634 ; 187.452,275.066 188.976,273.542 192.024,270.494 195.072,267.446 198.12,264.398 201.168,261.35 204.216,258.302 207.264,255.254 210.312,252.206 213.36,249.158 ; 188.976,275.066 192.024,272.018 195.072,268.97 198.12,265.922 201.168,262.874 204.216,259.826 207.264,256.778 210.312,253.73 213.36,250.682 ; 190.5,275.066 192.024,273.542 195.072,270.494 198.12,267.446 201.168,264.398 204.216,261.35 207.264,258.302 210.312,255.254 213.36,252.206 ; 192.024,275.066 195.072,272.018 198.12,268.97 201.168,265.922 204.216,262.874 207.264,259.826 210.312,256.778 213.36,253.73 ; 193.548,275.066 195.072,273.542 198.12,270.494 201.168,267.446 204.216,264.398 207.264,261.35 210.312,258.302 213.36,255.254 ; 195.072,275.066 198.12,272.018 201.168,268.97 204.216,265.922 207.264,262.874 210.312,259.826 213.36,256.778 ; 196.596,275.066 198.12,273.542 201.168,270.494 204.216,267.446 207.264,264.398 210.312,261.35 213.36,258.302 ; 198.12,275.066 201.168,272.018 204.216,268.97 207.264,265.922 210.312,262.874 213.36,259.826 ; 199.644,275.066 201.168,273.542 204.216,270.494 207.264,267.446 210.312,264.398 213.36,261.35 ; 201.168,275.066 204.216,272.018 207.264,268.97 210.312,265.922 213.36,262.874 ; 202.692,275.066 204.216,273.542 207.264,270.494 210.312,267.446 213.36,264.398 ; 204.216,275.066 207.264,272.018 210.312,268.97 213.36,265.922 ; 205.74,275.066 207.264,273.542 210.312,270.494 213.36,267.446 ; 207.264,275.066 210.312,272.018 213.36,268.97 ; 208.788,275.066 210.312,273.542 213.36,270.494 ; 210.312,275.066 213.36,272.018 ; 211.836,275.066 213.36,273.542
  TopLayer w0.381: 176.784,167.399 213.36,167.399 ; 176.784,193.808 213.36,193.808 ; 176.784,215.646 213.36,215.646 ; 176.784,232.152 213.36,232.152 ; 176.784,246.626 213.36,246.626 ; 179.832,156.988 179.832,275.066 ; 182.88,156.988 182.88,167.399 182.88,193.808 182.88,215.646 182.88,232.152 182.88,246.626 182.88,275.066 ; 185.928,156.988 185.928,167.399 185.928,193.808 185.928,215.646 185.928,232.152 185.928,246.626 185.928,275.066 ; 188.976,156.988 188.976,167.399 188.976,193.808 188.976,215.646 188.976,232.152 188.976,246.626 188.976,275.066 ; 192.024,156.988 192.024,167.399 192.024,193.808 192.024,215.646 192.024,232.152 192.024,246.626 192.024,275.066 ; 195.072,156.988 195.072,167.399 195.072,193.808 195.072,215.646 195.072,232.152 195.072,246.626 195.072,275.066 ; 198.12,156.988 198.12,167.399 198.12,193.808 198.12,215.646 198.12,232.152 198.12,246.626 198.12,275.066 ; 201.168,156.988 201.168,167.399 201.168,193.808 201.168,215.646 201.168,232.152 201.168,246.626 201.168,275.066 ; 204.216,156.988 204.216,167.399 204.216,193.808 204.216,215.646 204.216,232.152 204.216,246.626 204.216,275.066 ; 207.264,156.988 207.264,167.399 207.264,193.808 207.264,215.646 207.264,232.152 207.264,246.626 207.264,275.066 ; 210.312,156.988 210.312,167.399 210.312,193.808 210.312,215.646 210.312,232.152 210.312,246.626 210.312,275.066 ; 213.36,167.399 213.36,193.808 ; 213.36,167.399 213.36,156.988 176.784,156.988 176.784,275.066 213.36,275.066 213.36,246.626 ; 213.36,193.808 213.36,215.646 ; 213.36,215.646 213.36,232.152 ; 213.36,232.152 213.36,246.626

## Polygon pours and split planes (outlines as drawn)
P12V0 on Internal Plane 2 (split plane): 161.849,170.937 161.849,167.313 159.937,165.401 150.25,165.401 150.211,165.396 150.174,165.381 150.143,165.357 148.614,163.828 148.59,163.796 148.574,163.76 148.569,163.721 148.569,156.783 147.36,155.574 141.19,155.574 139.901,156.863 139.901,167.187 144.563,171.849 160.937,171.849
P3V3 on Internal Plane 2 (split plane): 164.49,152.91 102.11,152.91 102.11,161 102.101,161.1 102.072,161.195 102.024,161.284 101.961,161.361 101.01,162.311 101.01,242.039 101.961,242.989 102.024,243.066 102.072,243.155 102.101,243.25 102.11,243.35 102.11,251.889 164.49,251.889
GND on Internal Plane 1 (split plane): 164.49,152.91 102.11,152.91 102.11,161 102.101,161.1 102.072,161.195 102.024,161.284 101.961,161.361 101.01,162.311 101.01,242.039 101.961,242.989 102.024,243.066 102.072,243.155 102.101,243.25 102.11,243.35 102.11,251.889 164.49,251.889

## Keep-outs
KeepOutLayer:
  lines w0.203: 100.5,160.503 107.696,160.503 107.696,155.423 164,155.423 164,249.403 107.696,249.403 107.696,244.323 100.5,244.323 100.5,160.503

## Other copper
TopLayer:
  text "Board Layer Stack" at 179.07,248.15 h1.52 r90
  text "Constant" at 179.07,233.676 h1.52 r90
  text "3.5" at 185.166,233.676 h1.52 r90
  text "4.8" at 191.262,233.676 h1.52 r90
  text "4.2" at 197.358,233.676 h1.52 r90
  text "4.2" at 203.454,233.676 h1.52 r90
  text "3.5" at 209.55,233.676 h1.52 r90
  text "Thickness" at 179.07,217.17 h1.52 r90
  text "2.09mil" at 185.166,217.17 h1.52 r90
  text "1.40mil" at 188.214,217.17 h1.52 r90
  text "7.87mil" at 191.262,217.17 h1.52 r90
  text "1.42mil" at 194.31,217.17 h1.52 r90
  text "39.37mil" at 197.358,217.17 h1.52 r90
  text "1.42mil" at 200.406,217.17 h1.52 r90
  text "7.87mil" at 203.454,217.17 h1.52 r90
  text "1.40mil" at 206.502,217.17 h1.52 r90
  text "2.09mil" at 209.55,217.17 h1.52 r90
  text "Material" at 179.07,195.332 h1.52 r90
  text "Solder Resist" at 185.166,195.332 h1.52 r90
  text "Copper" at 188.214,195.332 h1.52 r90
  text "FR-4" at 191.262,195.332 h1.52 r90
  text "Copper" at 194.31,195.332 h1.52 r90
  text "Copper" at 200.406,195.332 h1.52 r90
  text "FR-4" at 203.454,195.332 h1.52 r90
  text "Copper" at 206.502,195.332 h1.52 r90
  text "Solder Resist" at 209.55,195.332 h1.52 r90
  text "Name" at 179.07,168.923 h1.52 r90
  text "TopOverlay" at 182.118,168.923 h1.52 r90
  text "TopSolder" at 185.166,168.923 h1.52 r90
  text "TopLayer" at 188.214,168.923 h1.52 r90
  text "Dielectric1" at 191.262,168.923 h1.52 r90
  text "Internal Plane 2" at 194.31,168.923 h1.52 r90
  text "Dielectric 4" at 197.358,168.923 h1.52 r90
  text "Internal Plane 1" at 200.406,168.923 h1.52 r90
  text "Dielectric2" at 203.454,168.923 h1.52 r90
  text "BottomLayer" at 206.502,168.923 h1.52 r90
  text "BottomSolder" at 209.55,168.923 h1.52 r90
  text "BottomOverlay" at 212.598,168.923 h1.52 r90
  text "Layer" at 179.07,158.512 h1.52 r90
  text "1" at 182.118,158.512 h1.52 r90
  text "2" at 185.166,158.512 h1.52 r90
  text "3" at 188.214,158.512 h1.52 r90
  text "4" at 191.262,158.512 h1.52 r90
  text "5" at 194.31,158.512 h1.52 r90
  text "6" at 197.358,158.512 h1.52 r90
  text "7" at 200.406,158.512 h1.52 r90
  text "8" at 203.454,158.512 h1.52 r90
  text "9" at 206.502,158.512 h1.52 r90
  text "10" at 209.55,158.512 h1.52 r90
  text "11" at 212.598,158.512 h1.52 r90
Internal Plane 2 (plane layer: these items are gaps in the copper):
  lines w0.3: 139.75,156.8 141.127,155.423 147.423,155.423 148.721,156.721 148.721,163.721 150.25,165.25 160,165.25 162,167.25 162,171 161,172 147,172 144.5,172 139.75,167.25 139.75,156.8

## Silkscreen, mask and mechanical layers (free items; w line width, h text height)
TopOverlay:
  drawing of 1239 lines, arcs and shapes, not listed
  text "PCB 3U CameraLink  rev1.0" at 120.396,248.641 h1.52
  text "Y0" at 113.792,232.918 h1 r90
  text "Y1" at 118.618,228.854 h1 r90
  text "Y2" at 113.792,225.044 h1 r90
  text "YCLK" at 118.872,219.456 h1 r90
  text "Y3" at 113.792,217.424 h1 r90
  text "GND" at 127,204.75 h1
  text "X0" at 113.538,196.85 h1 r90
  text "X1" at 117.856,193.802 h1 r90
  text "X2" at 113.538,188.722 h1 r90
  text "XCK" at 118.11,184.996 h1 r90
  text "X3" at 113.815,182.035 h1 r90
  text "SERX" at 122.682,181.864 h1
  text "SERTX" at 119.768,176.699 h1
  text "CC0" at 129.286,176.53 h1
  text "CC2" at 121.571,172.923 h1
  text "CC1" at 129.425,172.825 h1
  text "KASLI CH0...7 EEM-A" at 142.215,169.926 h1.02 r90
  text "KASLI CH8...15 EEM-B" at 153.746,168.808 h1.02 r90
  text "CC3" at 129.286,168.656 h1
  text "3.3V" at 110.75,160.75 h1
  text "MP1" at 124,159.25 h1
  text "M1" at 111,159 h1
  text "M2" at 111,157.5 h1
  text "MP2" at 123,157.25 h1
  text "12V" at 111,156 h1
  text "GND" at 131.5,154.25 h1
  text "12V" at 126.75,154 h1
  text "+3.3" at 135.75,154 h1.02
BottomOverlay:
  text "PCB 3U CameraLink  rev1.0" at 146.507,248.717 h1.52
Mechanical1:
  the board outline again, w0.508
Mechanical13:
  lines w0.1: 99.056,152.362 99.056,253.344

## Text inside footprints (layer, text, board x,y; h text height)
J1: TopOverlay "1" at 110.389,176.439 h1.02 r90; TopOverlay "2" at 108.484,177.309 h1.02 r90; TopOverlay "15" at 104.674,176.609 h1.02 r90; TopOverlay "14" at 106.579,175.489 h1.02 r90; TopOverlay "26" at 106.584,194.399 h1.02 r90; TopOverlay "13" at 110.394,194.524 h1.02 r90; TopOverlay "12" at 108.489,193.244 h1.02 r90; TopOverlay "25" at 104.679,193.119 h1.02 r90; Mechanical14 "1" at 110.389,176.439 h1.02 r90; Mechanical14 "2" at 108.484,177.309 h1.02 r90; Mechanical14 "15" at 104.674,176.609 h1.02 r90; Mechanical14 "14" at 106.579,175.489 h1.02 r90; Mechanical14 "26" at 106.584,194.399 h1.02 r90; Mechanical14 "13" at 110.394,194.524 h1.02 r90; Mechanical14 "12" at 108.489,193.244 h1.02 r90; Mechanical14 "25" at 104.679,193.119 h1.02 r90
J2: TopOverlay "1" at 110.294,214.44 h1.02 r90; TopOverlay "2" at 108.389,215.31 h1.02 r90; TopOverlay "15" at 104.579,214.61 h1.02 r90; TopOverlay "14" at 106.484,213.49 h1.02 r90; TopOverlay "26" at 106.489,232.4 h1.02 r90; TopOverlay "13" at 110.299,232.525 h1.02 r90; TopOverlay "12" at 108.394,231.245 h1.02 r90; TopOverlay "25" at 104.584,231.12 h1.02 r90; Mechanical14 "1" at 110.294,214.44 h1.02 r90; Mechanical14 "2" at 108.389,215.31 h1.02 r90; Mechanical14 "15" at 104.579,214.61 h1.02 r90; Mechanical14 "14" at 106.484,213.49 h1.02 r90; Mechanical14 "26" at 106.489,232.4 h1.02 r90; Mechanical14 "13" at 110.299,232.525 h1.02 r90; Mechanical14 "12" at 108.394,231.245 h1.02 r90; Mechanical14 "25" at 104.584,231.12 h1.02 r90
J14: TopOverlay "30" at 149.667,168.855 h1.02 r270; Mechanical14 "30" at 149.667,168.855 h1.02 r270
J24: TopOverlay "30" at 161.167,169.105 h1.02 r270; Mechanical14 "30" at 161.167,169.105 h1.02 r270